# Altium PCB opamp.PcbDoc
Units mil, origin at the board's own origin, x right, y up, seen from the top; angles counter-clockwise.
Board outline 2650 x 2100 mil, 2 copper layers (Top Layer, Bottom Layer); 29 components, 0 nets, 71 pads, 20 vias.
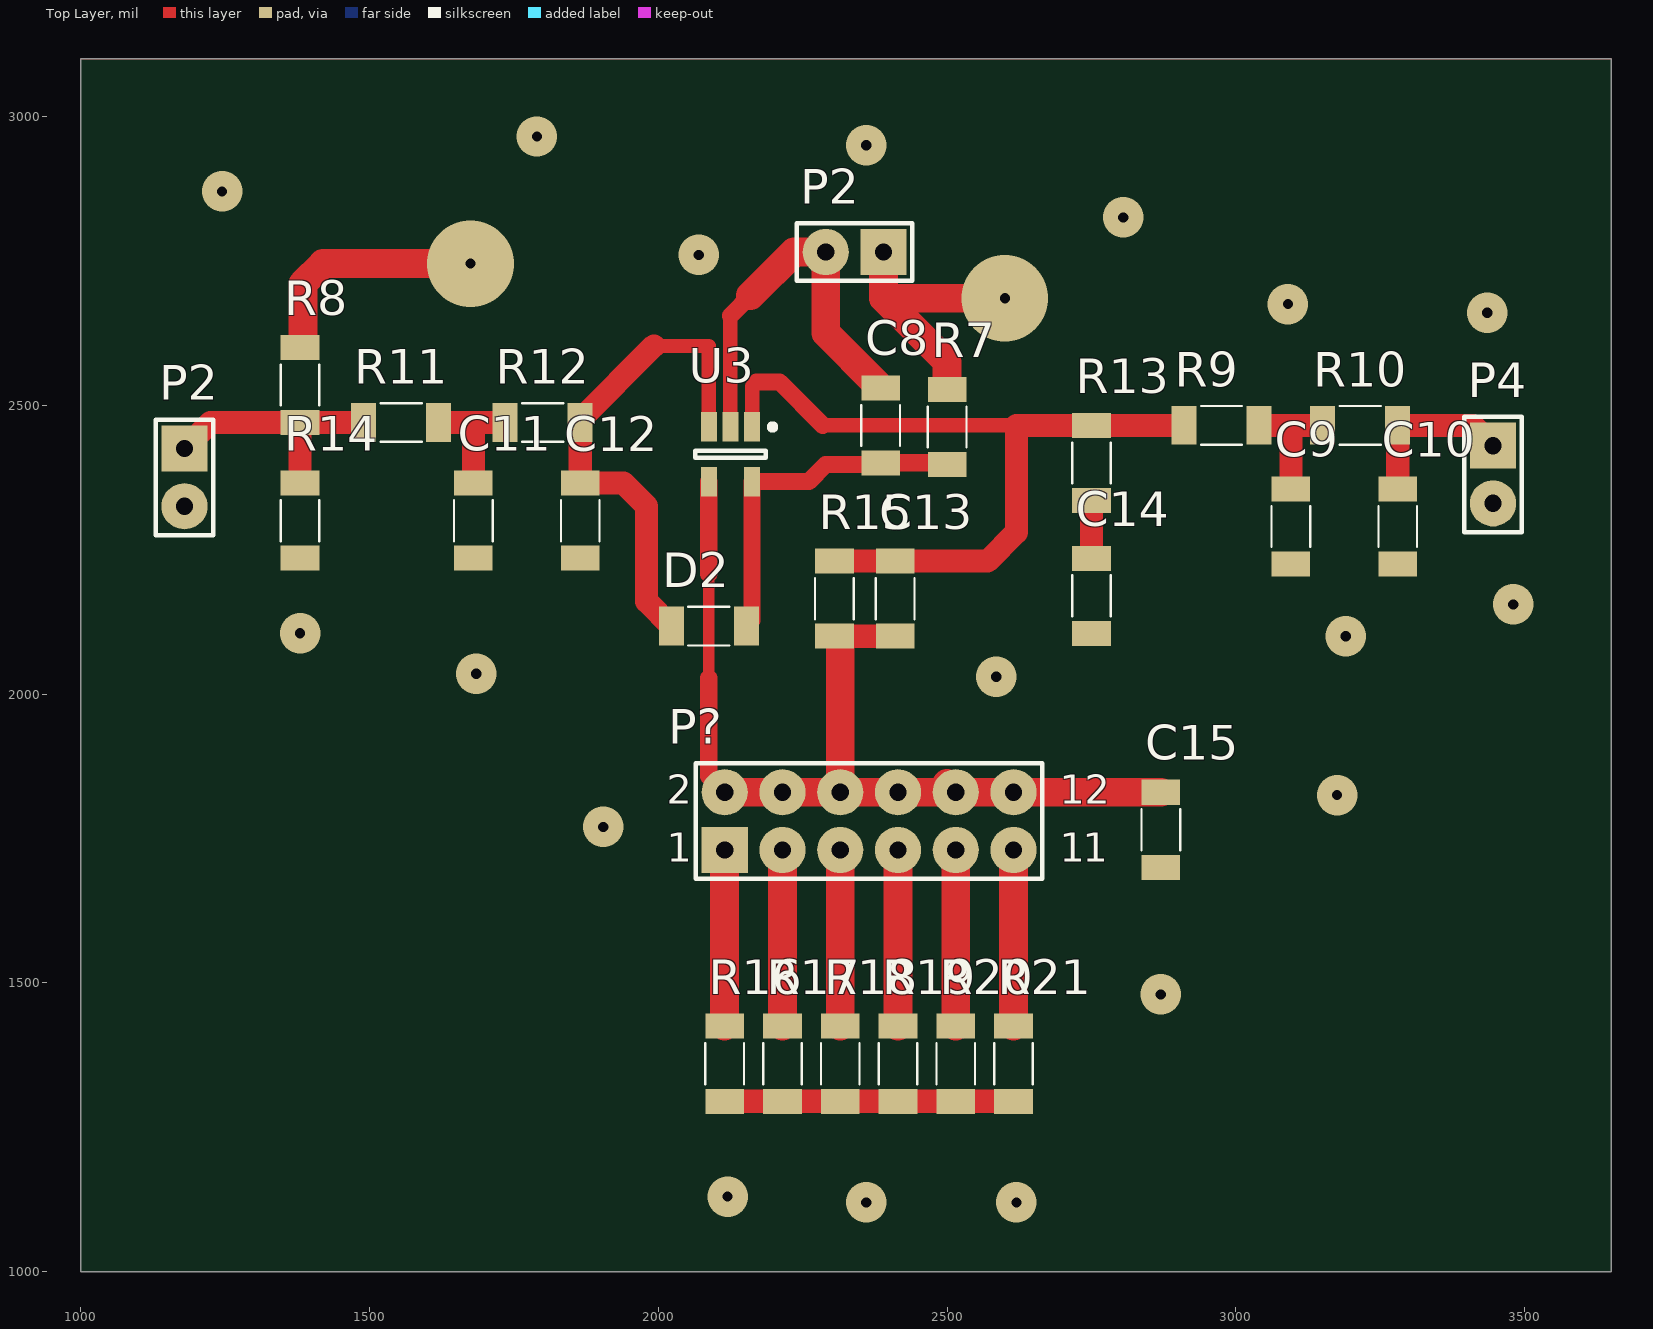
[diagram p0: Top Layer view]
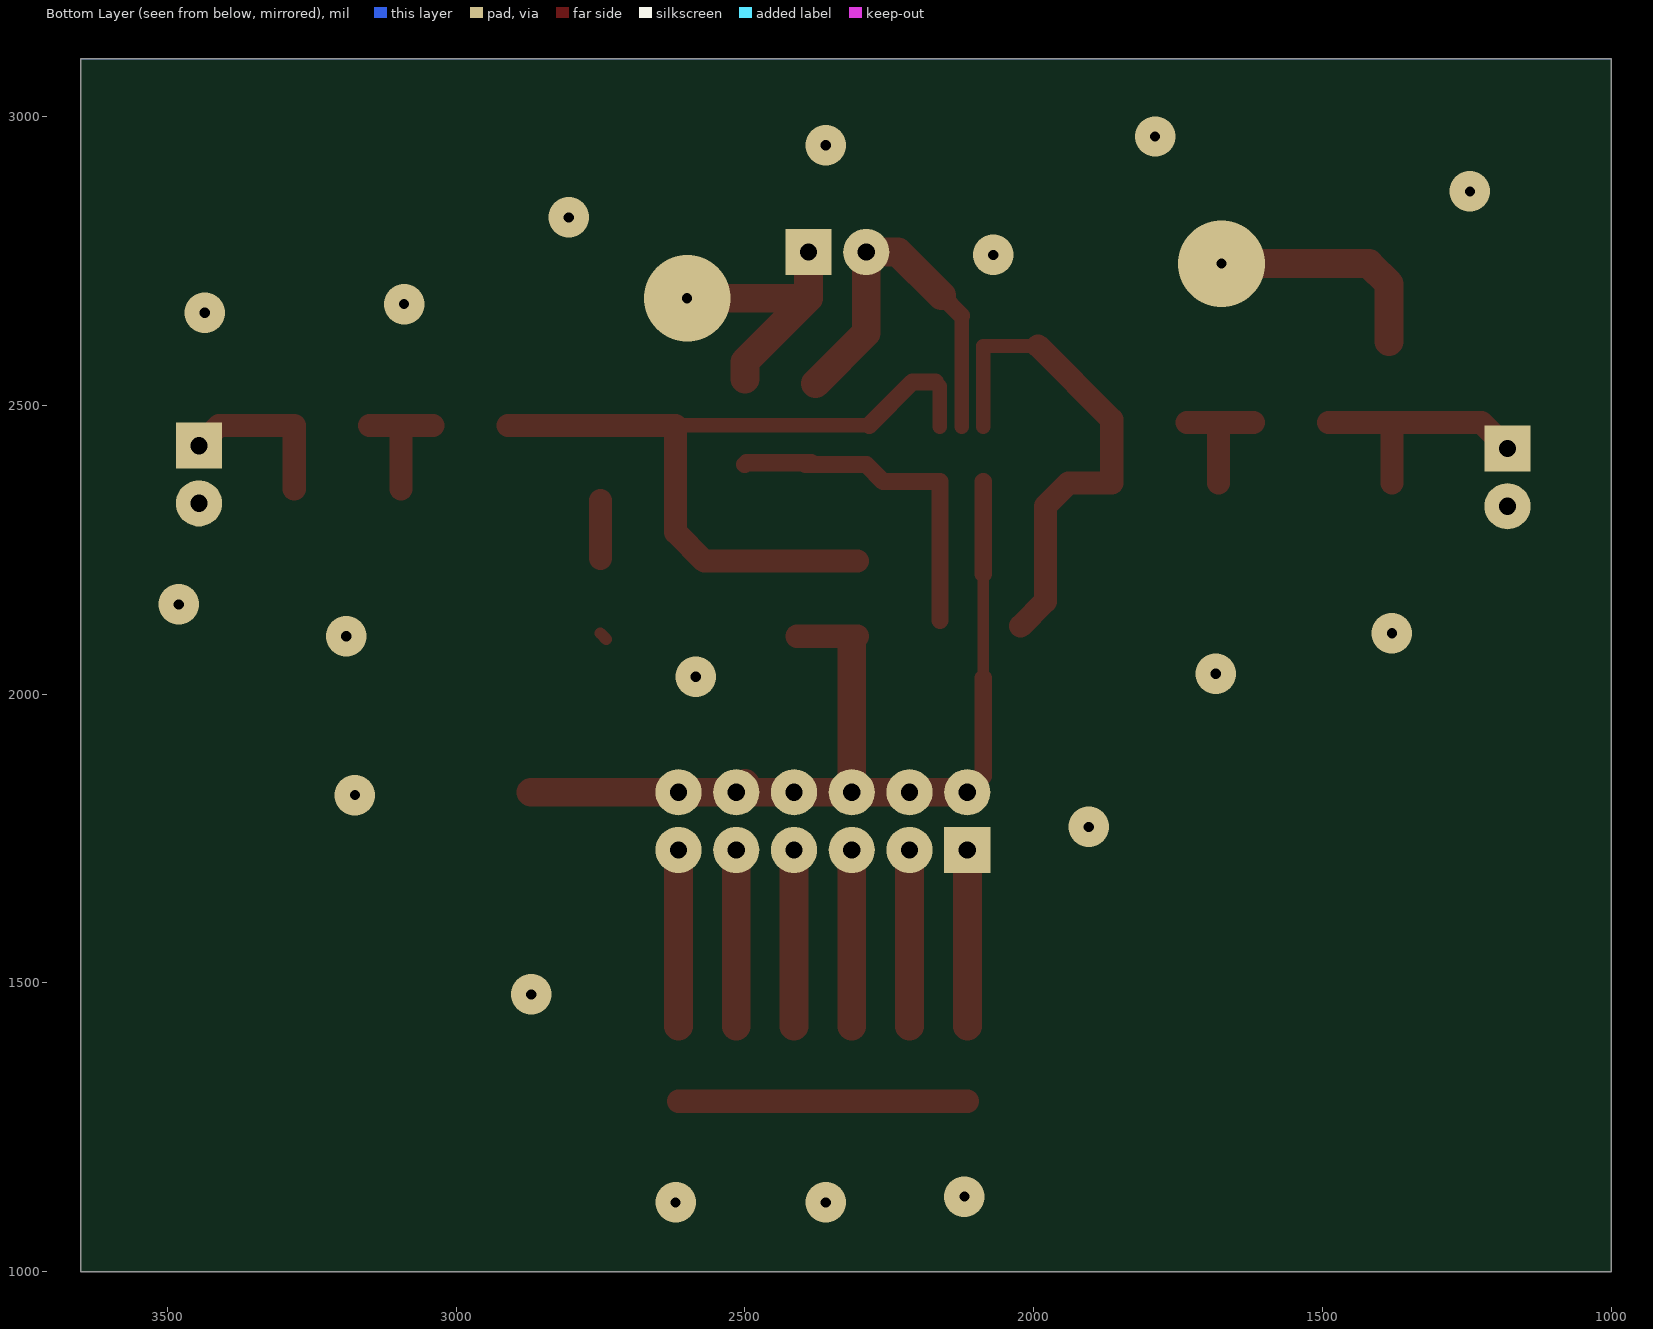
[diagram p1: Bottom Layer view, seen from below]

## Layer stack, top to bottom
Top Solder: solder mask 0.4, Solder Resist, Dk 3.5
Top Layer: signal copper 1.4
Dielectric 1: dielectric 12.6, FR-4, Dk 4.8
Bottom Layer: signal copper 1.4
Bottom Solder: solder mask 0.4, Solder Resist, Dk 3.5

## Board outline
1000,1000 1000,3100 3650,3100 3650,1000

## Design rules (kind name [scope] priority, off if disabled: settings)
Clearance [All] p1: gap=10
PolygonConnect [All] p1: connectstyle=Relief reliefconductorwidth=10 reliefentries=4 polygonreliefangle="90 Angle" airgapwidth=10
RoutingVias [All] p1: holewidth=28 width=50 viastyle="Through Hole" minholewidth=28 minwidth=50 maxholewidth=28 maxwidth=50
SolderMaskExpansion [All] p1: expansion=4
Width [All] p1: maxlimit=70 minlimit=20 preferedwidth=30 minimp=50.000000 maximp=50.000000 favimp=50.000000
30 further rules are at their usual default settings.

## Components (designator, comment, footprint, x,y, rotation, side; value= is the part's Value field where it differs from the comment)
C8 "Cap" SMD_Resistor_1206 2385,2465 r90 top
C9 "Cap" SMD_Resistor_1206 3095,2290 r90 top
C10 "Cap" SMD_Resistor_1206 3280,2290 r90 top
C11 "Cap" SMD_Resistor_1206 1680,2300 r90 top
C12 "Cap" SMD_Resistor_1206 1865,2300 r90 top
C13 "Cap" SMD_Resistor_1206 2410,2165 r90 top
C14 "Cap" SMD_Resistor_1206 2750,2170 r90 top
C15 "Cap" SMD_Resistor_1206 2870,1765 r90 top
D2 "Diode" SMD_Resistor_1206 2087.6,2117.6 r0 top
P2 "Header 2" HDR1X2 1180,2425 r270 top
P2 "Header 2" HDR1X2 2390,2765 r180 top
P4 "Header 2" HDR1X2 3445,2430 r270 top
P? "Header 6X2" HDR2X6 2115,1730 r0 top
R7 "Res2" SMD_Resistor_1206 2500,2462.24 r270 top
R8 "Res2" SMD_Resistor_1206 1380,2535 r270 top
R9 "Res2" SMD_Resistor_1206 2975,2465 r0 top
R10 "Res2" SMD_Resistor_1206 3215,2465 r0 top
R11 "Res2" SMD_Resistor_1206 1555,2470 r0 top
R12 "Res2" SMD_Resistor_1206 1800,2470 r0 top
R13 "Res2" SMD_Resistor_1206 2750,2400 r90 top
R14 "Res2" SMD_Resistor_1206 1380,2300 r270 top
R15 "Res2" SMD_Resistor_1206 2305,2165 r90 top
R16 "Res2" SMD_Resistor_1206 2115,1360 r90 top
R17 "Res2" SMD_Resistor_1206 2215,1360 r90 top
R18 "Res2" SMD_Resistor_1206 2315,1360 r90 top
R19 "Res2" SMD_Resistor_1206 2415,1360 r90 top
R20 "Res2" SMD_Resistor_1206 2515,1360 r90 top
R21 "Res2" SMD_Resistor_1206 2615,1360 r90 top
U3 "AMP-OPA-MCP6031-SOT5" SOT-23-OT5_M 2125,2415 r270 top

## Footprints (in the part's own frame and the unit in brackets; to place one, negate y for a bottom-side part, rotate by r counter-clockwise, add the part's x,y. Pads: shape width x height; smd on the part's side, far side on the other; paste and mask are expansions set on the pad)
HDR1X2 [mil] "Connector; Header; 2 Position"
  rect 80x80 hole 30: 1(0,0)
  round 80 hole 30: 2(100,0)
  silkscreen extent -50,-50 150,50
HDR2X6 [mil] "Connector; Header; 6x2 Position"
  rect 80x80 hole 30: 1(0,0)
  round 80 hole 30: 2(0,100) 3(100,0) 4(100,100) 5(200,0) 6(200,100) 7(300,0) 8(300,100) 9(400,0) 10(400,100) 11(500,0) 12(500,100)
  silkscreen extent -50,-50 550,150
SMD_Resistor_1206 [mm] "SMD Resistor, Inch 1206, Metric 3216."
  rect 1.1x1.7 smd: 1(-1.65,0) 2(1.65,0)
  silkscreen extent -0.9,-0.85 0.9,0.85, body extent -1.6,-0.8 1.6,0.8, height 0.8
SOT-23-OT5_M [mm] "SOT23, 5-Leads, Body 2.9x1.7mm, Pitch 0.95mm, Lead Span 2.8mm, IPC Low Density"
  rect 1.3x0.7 smd: 1(-1.2,0.95) 2(-1.2,0) 3(-1.2,-0.95) 4(1.2,-0.95) 5(1.2,0.95)
  silkscreen extent -1.32,-1.55 0.15,1.98, body extent -0.9,-1.55 0.9,1.55, height 1.45

## Part data
C8 C9 C10 C11 C12 C13 C14 C15: "Capacitor"
D2: "Default Diode"
P2 P2 P4: "Header, 2-Pin"
P?: "Header, 6-Pin, Dual row"
R7 R8 R9 R10 R11 R12 R13 R14 R15 R16 R17 R18 R19 R20 R21: "Resistor"

## Via types
v1: diameter 70, hole 17.72, Top Layer to Bottom Layer, 18 vias
v2: diameter 150, hole 17.72, Top Layer to Bottom Layer, 2 vias

## Nets (pads, with @x,y where several pads share a name; then routed paths per layer and width w, separated by ;. In a path a pad name is that pad's centre, name@x,y a point inside that pad or via, vN(x,y) a via of type N, cw(c..) or ccw(c..) an arc to the next point about the centre after c; other vN are vias at no path point)
pads on no net: C8.1 C8.2 C9.1 C9.2 C10.1 C10.2 C11.1 C11.2 C12.1 C12.2 C13.1 C13.2 C14.1 C14.2 C15.1 C15.2 D2.1 D2.2 P2.1 P2.2 P4.1 P4.2 P?.1 P?.2 P?.3 P?.4 P?.5 P?.6 P?.7 P?.8 P?.9 P?.10 P?.11 P?.12 R7.1 R7.2 R8.1 R8.2 R9.1 R9.2 R10.1 R10.2 R11.1 R11.2 R12.1 R12.2 R13.1 R13.2 R14.1 R14.2 R15.1 R15.2 R16.1 R16.2 R17.1 R17.2 R18.1 R18.2 R19.1 R19.2 R20.1 R20.2 R21.1 R21.2 U3.1 U3.2 U3.3 U3.4 U3.5
copper on no net: | length 9683.1
  Top Layer w20: 2087.6,2027.6 2087.6,2207.6 ; 2740,2095.04 2750,2105.04
  Top Layer w25: 1992.4,2602.4 2087.6,2602.4 2087.6,2462.24 ; 2125,2462.24 2125,2655 ; 2162.4,2462.24 2162.4,2532.4 2170,2540 ; 2285,2465 2620,2465
  Top Layer w30: 2087.6,1857.4 2087.6,2027.6 ; 2087.6,2207.6 2087.6,2367.76 ; 2125,2655 2160,2690 ; 2162.4,2127.44 2162.4,2367.76 2260.47,2367.76 2290,2397.28 2395,2397.28 ; 2170,2540 2210,2540 2285,2465 ; 2385,2400.04 2497.24,2400.04 2500,2397.28
  Top Layer w40: 1180,2425 1225.04,2470.04 1380,2470.04 ; 1380,2364.96 1380,2470.04 ; 1490.04,2470 1380.04,2470 1380,2470.04 ; 1619.96,2470 1680,2470 ; 1680,2364.96 1680,2470 ; 1735.04,2470 1680,2470 ; 1864.96,2470 1864.96,2474.96 1992.4,2602.4 ; 1865,2469.96 1865,2364.96 1940.04,2364.96 1980,2325 1980,2160.24 2022.64,2117.6 ; 2115,1295.04 2215,1295.04 2315,1295.04 2415,1295.04 2515,1295.04 2615,1295.04 ; 2305,2100.04 2410,2100.04 ; 2305,2229.96 2410,2229.96 2570,2229.96 2620,2279.96 2620,2465 2910.04,2465 ; 2750,2234.96 2750,2335.04 ; 3039.96,2465 3095,2465 ; 3095,2354.96 3095,2465 ; 3150.04,2465 3095,2465 ; 3280,2354.96 3279.96,2355 3279.96,2465 3410,2465 3445,2430
  Top Layer w50: 1385,2609.96 1385,2710 1420,2745 v2(1675,2745) ; 2115,1424.96 2115,1730 ; 2115,1830 2215,1830 2315,1830 ; 2160,2690 2235,2765 2290,2765 2290,2624.96 2377.48,2537.48 ; 2215,1424.96 2215,1730 ; 2315,1424.96 2315,1730 ; 2315,2090.04 2315,1830 ; 2390,2765 2390,2685 ; 2415,1424.96 2415,1730 ; 2500,1845 2515,1830 ; 2500,2545 2500,2575 2390,2685 ; 2515,1424.96 2515,1730 ; v2(2600,2685) 2390,2685 ; 2615,1424.96 2615,1730 ; 2870,1829.96 2869.96,1830 2615,1830 2515,1830 ; 2315,1830 2415,1830 2515,1830
  Bottom Layer w20: v2(1675,2745) v2@1675,2765
  other v1: 2360,1120 2620,1120 2120,1130 2870,1480 1905,1770 3175,1825 2585,2030 1685,2035 3190,2100 1380,2105 3480,2155 3435,2660 3090,2675 2070,2760 2805,2825 1245,2870 2360,2950 1790,2965

## Polygon pours and split planes (outlines as drawn)
no net on Top Layer "Top Layer-No Net" (solid, remove dead copper, pour order 4): 1000,3100 3650,3100 3650,1000 1000,1000
no net on Bottom Layer "Top Layer-No Net" (none, remove dead copper, pour order 8): 1000,3100 1000,1000 3650,1000 3650,3100

## Text inside footprints (layer, text, board x,y; h text height)
P?: Top Overlay "2" at 2015,1810 h50; Top Overlay "1" at 2015,1710 h50; Top Overlay "1" at 2695,1710 h50; Top Overlay "1" at 2735,1710 h50; Top Overlay "12" at 2695,1810 h50